# Altium PCB ZYNQ-HS-DEV-PCB.PcbDoc (part 3 of 13)
Units mm, origin at the board's own origin, x right, y up, seen from the top; angles counter-clockwise.
Board outline 125.73 x 111.93 mm, 10 copper layers (S1 (SIG), S2 (GND), S3 (SIG), S4 (GND), S5 (PWR), S6 (SIG), S7 (GND), S8 (SIG), S9 (GND), S10 (SIG)), stack 1.597 mm thick; 545 components, 400 nets, 2449 pads, 1577 vias.
Unrouted connection lines stored in the file: 309.
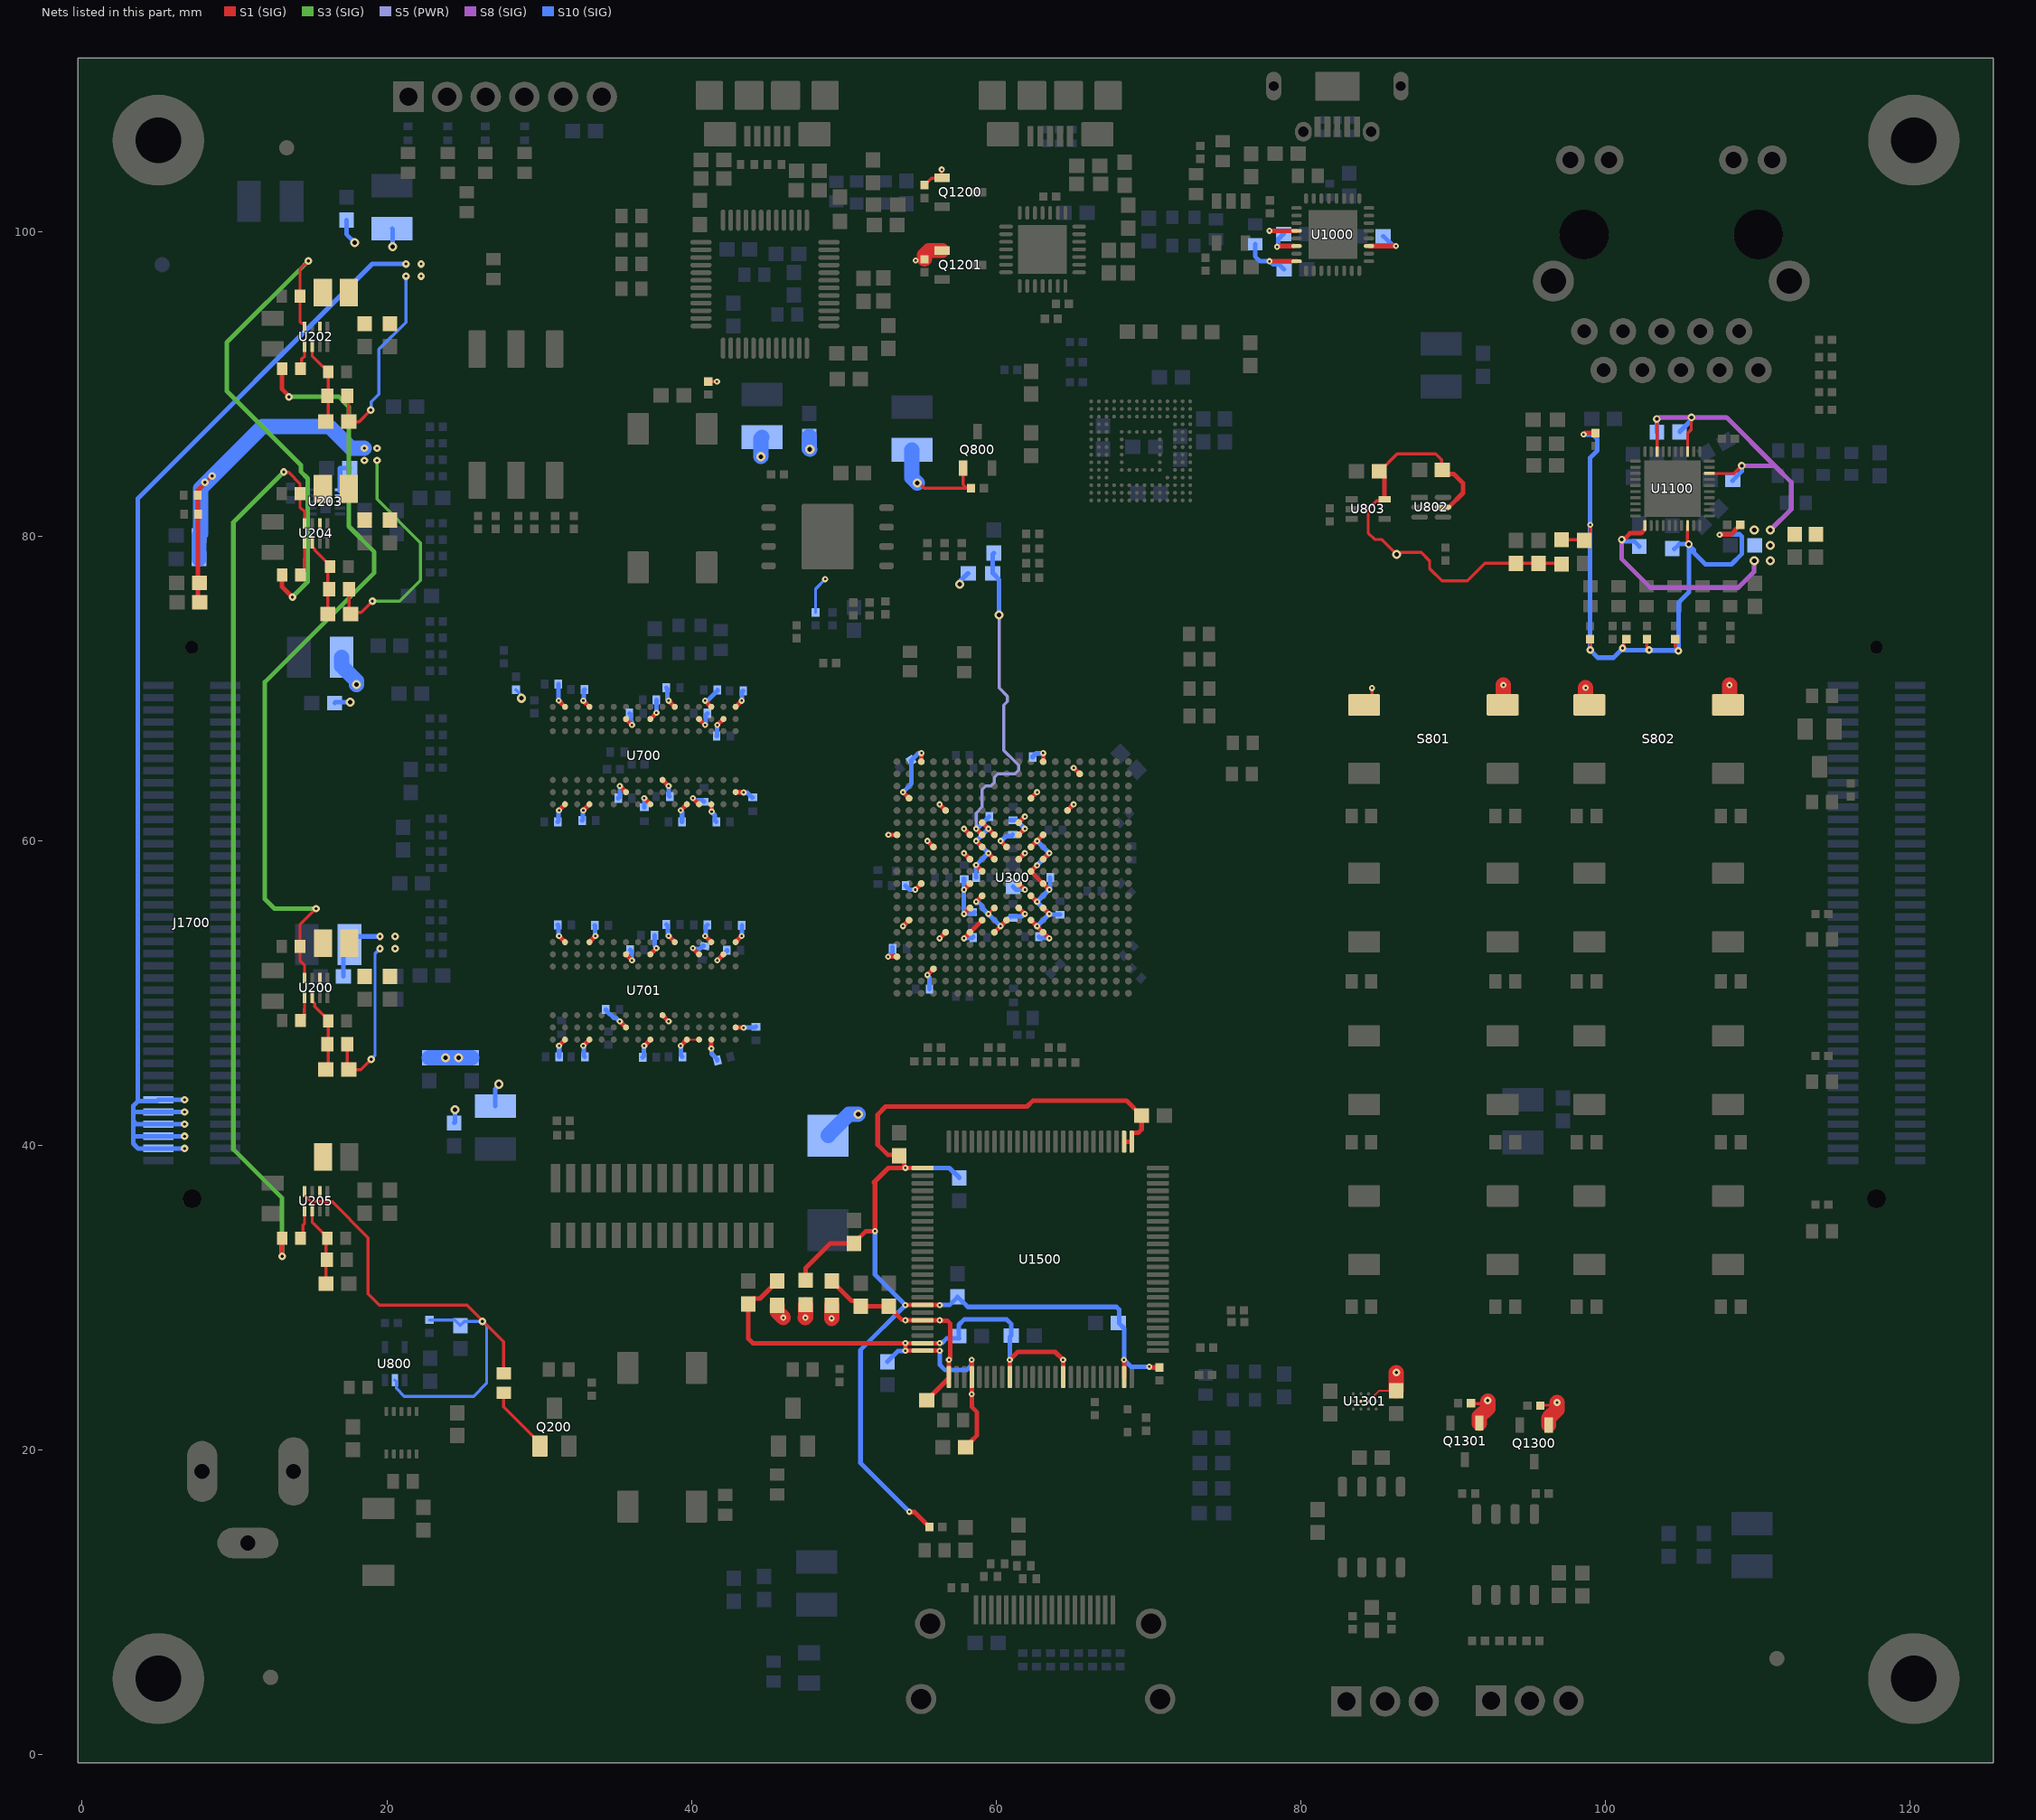
[diagram p11: the nets of this part, all layers, seen from the top]

## Part data
C200 C207 C215 C219: library part GRM1885C1H121JA01D, "CAP CER 120PF 50V C0G/NP0 0603 (1608) ±5%", Manufacturer="Murata Electronics", Package=0603, Tolerance=±5%, Voltage=50V, ComponentLink1Description=Datasheet, ComponentLink1URL=https://search.murata.co.jp/Ceramy/image/img/A01X/G101/ENG/GRM1885C1H121JA01-01.pdf, MPN=GRM1885C1H121JA01D
C201 C202 C208 C209 C212 C214 C216 C217 C220 C221 C602 C603 C714 C719 C736 C741 C1300 C1502 C1507 C1508 C1512: library part GRM188Z71A106MA73D, "CAP CER 10UF 10V X7R 0603 (1608) ±20%", Manufacturer="Murata Electronics", Package=0603, Tolerance=±20%, Voltage=10V, ComponentLink1Description=Datasheet, ComponentLink1URL=https://search.murata.co.jp/Ceramy/image/img/A01X/G101/ENG/GRM188Z71A106MA73-01A.pdf, MPN=GRM188Z71A106MA73D
C203 C210 C218 C222: library part GRM21BR71A475KE51L, "CAP CER 4.7UF 10V X7R 0805 (2012) ±10%", Manufacturer="Murata Electronics", Package=0805, Tolerance=±10%, Voltage=10V, ComponentLink1Description=Datasheet, ComponentLink1URL=https://search.murata.co.jp/Ceramy/image/img/A01X/G101/ENG/GRM21BR71A475KE51-01.pdf, MPN=GRM21BR71A475KE51L
C204 C205 C903 C908 C911 C1518 C1519: library part GRM188R61E105KA12D, "CAP CER 1UF 25V X5R 0603 (1608) ±10%", Manufacturer="Murata Power Solutions Inc.", Package=0603, Tolerance=±10%, Voltage=25V, ComponentLink1Description=Datasheet, ComponentLink1URL=https://search.murata.co.jp/Ceramy/image/img/A01X/G101/ENG/GRM188R61E105KA12-01.pdf, MPN=GRM188R61E105KA12D
C206 C1304: library part GCM188R71H102KA37D, "CAP CER 1000PF 50V X7R 0603 (1608) ±10%", Manufacturer="Murata Electronics", Package=0603, Tolerance=±10%, Voltage=50V, ComponentLink1Description=Datasheet, ComponentLink1URL=https://search.murata.co.jp/Ceramy/image/img/A01X/G101/ENG/GCM188R71H102KA37-01.pdf, MPN=GCM188R71H102KA37D
C211 C500 C502 C504 C508 C510 C511 C512 C513 C514 C515 C516 C607 C608 C609 C610 C611 C612 C701 C702 C703 C704 C705 C707 C708 C709 C710 C711 C712 C713 C716 C717 C718 C721 C722 C723 C725 C726 C727 C728 C729 C731 C732 C733 C734 C735 C738 C739 C740 C743 C744 C745 C800 C801 C802 C803 C804 C805 C806 C900 C901 C902 C905 C906 C907 C910 C912 C1000 C1002 C1003 C1004 C1005 C1007 C1100 C1102 C1103 C1105 C1107 C1108 C1109 C1111 C1113 C1115 C1116 C1200 C1202 C1301 C1302 C1303 C1305 C1500 C1501 C1503 C1504 C1505 C1506 C1509 C1510 C1511 C1513 C1514 C1515 C1516 C1517: library part GRM155R71C104KA88J, "CAP CER 0.1UF 16V X7R 0402 (1005) ±10%", Manufacturer="Murata Electronics", Package=0402, Tolerance=±10%, Voltage=16V, ComponentLink1Description=Datasheet, ComponentLink1URL=https://search.murata.co.jp/Ceramy/image/img/A01X/G101/ENG/GRM155R71C104KA88-01.pdf, MPN=GRM155R71C104KA88J
C213 C300 C306 C307 C308 C309 C310 C313 C318 C319 C320 C321 C327 C328 C329 C330 C333 C337 C338 C339 C340 C341 C342 C343 C344 C347 C353 C354 C355 C356 C600 C601 C715 C720 C737 C742 C1001: library part GRM155R60J474KE19D, "CAP CER 0.47UF 6.3V X5R 0402(1005) ±10%", Manufacturer="Murata Electronics", Package=0402, Tolerance=±10%, Voltage=6.3V, ComponentLink1Description=Datasheet, ComponentLink1URL=https://search.murata.co.jp/Ceramy/image/img/A01X/G101/ENG/GRM21BR71A475KE51-01.pdf, MPN=GRM155R60J474KE19D
C301: library part GRM188R60G106ME47D, "CAP CER 10UF 4V X5R 0603 (1608) ±20%", Manufacturer="Murata Electronics", Package=0603, Tolerance=±20%, Voltage=4V, ComponentLink1Description=Datasheet, ComponentLink1URL=https://search.murata.co.jp/Ceramy/image/img/A01X/G101/ENG/GRM188R60G106ME47-01.pdf, MPN=GRM188R60G106ME47D
C302 C316 C324 C334 C350: library part GRM32ER70J476ME20L, "CAP CER 47UF 6.3V X7R 1210 1210 (3225) ±20%", Manufacturer="Murata Electronics", Package=1210, Tolerance=±20%, Voltage=6.3V, ComponentLink1Description=Datasheet, ComponentLink1URL=https://search.murata.co.jp/Ceramy/image/img/A01X/G101/ENG/GRM32ER70J476ME20-01.pdf, MPN=GRM32ER70J476ME20L
C303: library part T525D337M006ATE025, "CAP TANT POLY 330UF 6.3V 2917 (7343) ±20%", Manufacturer=KEMET, Package=2917, Tolerance=±20%, Voltage="6.3 V", ComponentLink1Description=Datasheet, ComponentLink1URL=https://search.kemet.com/download/specsheet/T525D337M006ATE025, ESR="25mOhm @ 100kHz", MPN=T525D337M006ATE025
C304 C305 C311 C314 C317 C322 C325 C326 C332 C335 C336 C345 C348 C351 C352 C501 C503 C505 C506 C507 C509 C604 C605 C606 C904 C909 C1006 C1101 C1104 C1106 C1110 C1112 C1114 C1201 C1203 C1204 C1205 C1306: library part CL10A475KP8NNNC, "CAP CER 4.7UF 10V X5R 0603 (1608) ±10%", Manufacturer="Samsung Electro-Mechanics", Package=0603, Tolerance=±10%, Voltage=10V, ComponentLink1Description=Datasheet, ComponentLink1URL=https://mm.digikey.com/Volume0/opasdata/d220001/medias/docus/609/CL10A475KP8NNNC_Spec.pdf, MPN=CL10A475KP8NNNC
C312 C315 C323 C331 C346 C349: library part GRM32EE70G107ME19L, "CAP CER 100UF 4V X7U 1210 (3225) ±20%", Manufacturer="Murata Electronics", Package=1210, Tolerance=±20%, Voltage=4V, ComponentLink1Description=Datasheet, ComponentLink1URL=https://search.murata.co.jp/Ceramy/image/img/A01X/G101/ENG/GRM32EE70G107ME19-01.pdf, MPN=GRM32EE70G107ME19L
C357: library part CC0805KRX7RCBB102, "CAP CER 1000PF 1KV X7R 0805 (2012) ±10%", Manufacturer=YAGEO, Package=0805, Tolerance=±10%, Voltage=1kV, ComponentLink1Description=Datasheet, ComponentLink1URL=https://search.murata.co.jp/Ceramy/image/img/A01X/G101/ENG/GRM21BR71A475KE51-01.pdf, MPN=CC0805KRX7RCBB102
C1008 C1117 C1520: library part C0603C104K5RACTU, "CAP CER 0.1UF 50V X7R 0603 (1608) ±10%", Manufacturer=KEMET, Package=0603, Tolerance=±10%, Voltage=50V, ComponentLink1Description=Datasheet, ComponentLink1URL=https://yageogroup.com/content/datasheet/asset/file/KEM_C1002_X7R_SMD, MPN=C0603C104K5RACTU
D200: library part CMS04, "Diode 30 V 5A Surface Mount M-FLAT (2.4x3.8)", Manufacturer="Toshiba Semiconductor and Storage", MPN=CMS04(TE12L,Q, Package=SOD-123, ComponentLink1Description=Datasheet, ComponentLink1URL=https://toshiba.semicon-storage.com/info/CMS04_datasheet_en_20180911.pdf?did=3133&prodName=CMS04
D201 D400 D800 D1003 D1400 D1401 D1402: library part LTST-C191TGKT, "LED GREEN CLEAR CHIP SMD", Manufacturer="Lite-On Inc.", Package=0603, ComponentLink1Description=Datasheet, ComponentLink1URL=https://optoelectronics.liteon.com/upload/download/DS22-2000-300/LTST-C191TGKT.PDF, MPN=LTST-C191TGKT
D500 D501 D502 D503 D504 D505 D1000 D1001 D1002 D1200 D1201 D1202 D1501 D1502 D1503 D1504 D1505 D1506 D1507 D1508 D1509 D1510 D1511 D1512 D1513: "Varistor 1 Circuit Surface Mount, MLCV 0402 (1005 Metric)", Manufacturer="EPCOS - TDK Electronics", Package=0402, ComponentLink1Description=Datasheet, ComponentLink1URL=https://www.tdk-electronics.tdk.com/inf/75/ds/High_speed_series.pdf?ref_disty=digikey, MPN=B72590D0050H160
D1500: "DIODE STANDARD 100V 200MA SOD523", Manufacturer=onsemi, Package=SOD-523, ComponentLink1Description=Datasheet, ComponentLink1URL=https://www.onsemi.com/pdf/datasheet/bas16xv2t1-d.pdf, MPN=BAS16XV2T1G
FB300: library part BLM18SG121TN1D, "FERRITE BEAD 120 OHM 0603 (1608) 3A 25mOhm", Current Rating (Max)=3A, DC Resistance (DCR) (Max)=25mOhm, Manufacturer="Murata Electronics", Package=0603, ComponentLink1Description=Datasheet, ComponentLink1URL=https://pim.murata.com/asset/pim4/ferriteBeadInductortypefilter/ENFA0003_PDF_FERRITEBEADINDUCTORTYPEFILTER?lastModifiedDatetime=20250707190934, ComponentLink2Description=Website, ComponentLink2URL=https://pim.murata.com/en-global/pim/details/?partNum=BLM18SG121TN1%23, MPN=BLM18SG121TN1D, Impedance @ Frequency="120 Ohms @ 100 MHz"
FB500 FB501 FB502 FB1100 FB1101 FB1200 FB1500 FB1501 FB1502 FB1503: library part BLM18SG121TN1D, "FERRITE BEAD 120 OHM 0603 (1608) 3A 25mOhm", Current Rating (Max)=3A, DC Resistance (DCR) (Max)=25mOhm, Manufacturer="Murata Electronics", Package=0603, Impedance @ Frequency="120 Ohms @ 100 MHz", ComponentLink1Description=Datasheet, ComponentLink1URL=https://pim.murata.com/asset/pim4/ferriteBeadInductortypefilter/ENFA0003_PDF_FERRITEBEADINDUCTORTYPEFILTER?lastModifiedDatetime=20250707190934, ComponentLink2Description=Website, ComponentLink2URL=https://pim.murata.com/en-global/pim/details/?partNum=BLM18SG121TN1%23, MPN=BLM18SG121TN1D
FID200 FID201 FID202 FID203 FID204 FID205: library part Fiducial_Marker, "Fiducial Marker 1mm No Bom"
J200: "CONNECTOR DC JACK POWER PCB TYPE 2.50MM KLS", Manufacturer="KLS ELECTRONIC", MPN=L-KLS1-DC-005A-2.0, ComponentLink1Description=Datasheet, ComponentLink1URL=https://www.ozdisan.com/api/pdf/product/assets/KLS1-DC-005A.pdf
J500 J1200: library part USB-MICRO-B, "CONN RCPT USB2.0 MICRO B SMD R/A", Manufacturer="Amphenol ICC (FCI)", ComponentLink1Description=Datasheet, ComponentLink1URL=https://cdn.amphenol-cs.com/media/wysiwyg/files/documentation/datasheet/inputoutput/io_usb_micro.pdf, MPN=10118192-0001LF
J501: library part JTAG-HEADER, "JTAG CONN HEADER VERT 6POS 2.54MM"
J1000: library part USB-MICRO-AB, "CONN RCPT MICRO USB AB 5P SMD RA", Manufacturer=Molex, ComponentLink1Description=Datasheet, ComponentLink1URL=https://www.molex.com/content/dam/molex/molex-dot-com/products/automated/en-us/salesdrawingpdf/475/47590/475900001_sd.pdf?inline, MPN=0475900001
J1100: "Jack Modular Connector RJ45 Through Hole Shielded", Manufacturer=Hanrun, ComponentLink1Description=Datasheet, ComponentLink1URL=https://www.lcsc.com/datasheet/C55679.pdf, MPN=HY911130A
J1300 J1301: library part 282834-3, "TERM BLK 3P SIDE ENT 2.54MM PCB"
J1500: "CONN RCPT 1.4 HDMI 19POS SMD R/A", Manufacturer="Amphenol ICC (FCI)", ComponentLink1Description=Datasheet, ComponentLink1URL=https://cdn.amphenol-cs.com/media/wysiwyg/files/documentation/datasheet/inputoutput/io_hdmi_receptacles.pdf, ComponentLink2Description=Drawing, ComponentLink2URL=https://cdn.amphenol-cs.com/media/wysiwyg/files/drawing/10029449.pdf, ComponentLink3Description="Product Specification", ComponentLink3URL=https://cdn.amphenol-cs.com/media/wysiwyg/files/documentation/gs-12-309.pdf, MPN=10029449-111RLF
J1600: "CONN FPC VERT 15POS 1MM SMD", Manufacturer="TE Connectivity AMP Connectors", ComponentLink2Description=Drawing, ComponentLink2URL=https://www.te.com/commerce/DocumentDelivery/DDEController?Action=srchrtrv&DocNm=1734248&DocType=Customer%20Drawing&DocLang=English&DocFormat=pdf&PartCntxt=1-1734248-5, ComponentLink3Description="Product Specification", ComponentLink3URL=https://www.te.com/commerce/DocumentDelivery/DDEController?Action=srchrtrv&DocNm=108-57080&DocType=Specification%20Or%20Standard&DocLang=English&DocFormat=pdf&PartCntxt=1-1734248-5, MPN=1-1734248-5
J1700 J1701: "BergStak® Lite 0.80mm, Board-to-Board Connector, 80 Positions, Dual Row, Vertical Header", Manufacturer=Amphenol, MPN=10144518-082802LF
L200 L201 L202 L203: library part DFE201610E-R47M=P2, "FIXED IND 470NH 3.6A 32 MOHM SMD 0806 (2016 Metric)", Current - Saturation (Isat)=4.8A, Current Rating (Max)="3.6 A", DC Resistance (DCR) (Max)=32mOhm, Manufacturer="Murata Electronics", MPN=DFE201610E-R47M=P2, Package=0806, Inductance="470 nH", ComponentLink1Description=Datasheet, ComponentLink1URL=https://pim.murata.com/asset/pim4/inductor/J(E)TE243A-0001_PDF_INDUCTOR?lastModifiedDatetime=20250708072022, ComponentLink2Description=Website, ComponentLink2URL=https://pim.murata.com/en-global/pim/details/?partNum=DFE201610E-R47M%23
L1100: library part LQM18PN2R2MGHD, "FIXED IND 2.2UH 1.05A 250 MOHM 0603 (1608 Metric)", Current - Saturation (Isat)=250mA, Current Rating (Max)="1.05 A", DC Resistance (DCR) (Max)=250mOhm, Manufacturer="Murata Electronics", Package=0603, Inductance="2.2 µH", ComponentLink1Description=Datasheet, ComponentLink1URL=https://search.murata.co.jp/Ceramy/image/img/P02/JELF243B-0047.pdf, ComponentLink2Description=Website, ComponentLink2URL=https://pim.murata.com/en-eu/pim/details/?partNum=LQM18PN2R2MGHD, MPN=LQM18PN2R2MGHD
Q200 Q400 Q801: "N-Channel 20 V 1.3A (Ta) 500mW (Ta) Surface Mount SOT-23-3", Drain to Source Voltage (Vdss)="20 V", Manufacturer=onsemi, Package=SOT-23-3, ComponentLink1Description=Datasheet, ComponentLink1URL=https://www.onsemi.com/pdf/datasheet/nds331n-d.pdf, MPN=NDS331N, Rds On (Max) @ Id, Vgs="160mOhm @ 1.5A, 4.5V", Vgs (Max)=±8V
Q800 Q1200 Q1201 Q1300 Q1301: "N-Channel 50 V 200mA (Ta) 225mW (Ta) Surface Mount SOT-23-3 (TO-236)", Drain to Source Voltage (Vdss)="50 V", Manufacturer=onsemi, Package=SOT-23-3, ComponentLink1Description=Datasheet, ComponentLink1URL=https://www.onsemi.com/pdf/datasheet/bss138lt1-d.pdf, MPN=BSS138LT1G, Rds On (Max) @ Id, Vgs="3.5Ohm @ 200mA, 5V", Vgs (Max)=±20V
R200 R202 R204 R205 R207 R208 R209 R213 R214 R215 R217 R218: library part CRCW0603100KFKEA, "RES SMD 100K OHM 1% 1/8W 0603 (1608)", Manufacturer="Vishay Dale", Package=0603, Tolerance=±1%, Voltage=75V, ComponentLink1Description=Datasheet, ComponentLink1URL=https://www.vishay.com/docs/20035/dcrcwe3.pdf, MPN=CRCW0603100KFKEA
R201: library part CRCW060366K5FKEA, "RES SMD 66.5K OHM 1% 1/8W 0603 (1608)", Manufacturer="Vishay Dale", Package=0603, Tolerance=±1%, Voltage=75V, ComponentLink1Description=Datasheet, ComponentLink1URL=https://www.vishay.com/docs/20035/dcrcwe3.pdf, MPN=CRCW060366K5FKEA
R203 R300: library part CRCW06031M00FKEA, "RES SMD 1M OHM 1% 1/8W 0603 (1608)", Manufacturer="Vishay Dale", Package=0603, Tolerance=±1%, Voltage=75V, ComponentLink1Description=Datasheet, ComponentLink1URL=https://www.vishay.com/docs/20035/dcrcwe3.pdf, MPN=CRCW06031M00FKEA
R206: library part CRCW0603200KFKEBC, "RES 200K OHM 1% 1/10W 0603 (1608)", Manufacturer="Vishay Dale", Package=0603, Tolerance=±1%, Voltage=75V, ComponentLink1Description=Datasheet, ComponentLink1URL=https://www.vishay.com/docs/28773/crcwce3.pdf, MPN=CRCW0603200KFKEBC
R210 R404 R819 R916 R917 R918 R919 R920 R1110 R1111 R1112 R1113 R1114 R1118 R1122 R1400 R1401 R1402 R1407: library part RC0402JR-071KL, "RES 1K OHM 5% 1/16W 0402 (1005)", Manufacturer=YAGEO, Package=0402, Tolerance=±5%, Voltage=50V, ComponentLink1Description=Datasheet, ComponentLink1URL=https://yageogroup.com/content/datasheet/asset/file/PYU-RT_1-TO-0-01_ROHS_L, MPN=RC0402JR-071KL
R211 R400 R401 R402 R403 R820 R821 R822 R823 R824 R1004 R1403 R1404 R1405 R1406 R1408 R1409 R1410 R1411 R1412 R1413 R1414 R1415 R1505: library part RC0603FR-0710KL, "RES 10K OHM 1% 1/10W 0603(1608)", Manufacturer=YAGEO, Package=0603, Tolerance=±1%, Voltage=75V, ComponentLink1Description=Datasheet, ComponentLink1URL=https://yageogroup.com/content/datasheet/asset/file/PYU-RC_GROUP_51_ROHS_L, MPN=RC0603FR-0710KL
R212: library part CRCW0603124KFKEA, "RES SMD 124K OHM 1% 1/8W 0603 (1608)", Manufacturer="Vishay Dale", Package=0603, Tolerance=±1%, Voltage=75V, ComponentLink1Description=Datasheet, ComponentLink1URL=https://www.vishay.com/docs/20035/dcrcwe3.pdf, MPN=CRCW0603124KFKEA
R216: library part CRCW0603453KFKEAC, "RES 453K OHM 1% 1/10W 0603(1608)", Manufacturer="Vishay Dale", Package=0603, Tolerance=±1%, Voltage=75V, ComponentLink1Description=Datasheet, ComponentLink1URL=https://www.vishay.com/docs/28773/crcwce3.pdf, MPN=CRCW0603453KFKEAC
R405: library part RC0603FR-07330RL, "RES 330 OHM 1% 1/10W 0603(1608)", Manufacturer=YAGEO, Package=0603, Tolerance=±1%, Voltage=75V, ComponentLink1Description=Datasheet, ComponentLink1URL=https://yageogroup.com/content/datasheet/asset/file/PYU-RC_GROUP_51_ROHS_L, MPN=RC0603FR-07330RL
R500 R501 R502 R503 R505 R506 R507 R509 R510 R806 R809 R811 R812 R813 R814 R815 R816 R817 R1002 R1104 R1105 R1106 R1107 R1108 R1109 R1117 R1119 R1121 R1510: library part RC0603FR-0722RL, "RES 22 OHM 1% 1/10W 0603 (1608)", Manufacturer=YAGEO, Package=0603, Tolerance=±1%, Voltage=75V, ComponentLink1Description=Datasheet, ComponentLink1URL=https://yageogroup.com/content/datasheet/asset/file/PYU-RC_GROUP_51_ROHS_L, MPN=RC0603FR-0722RL
R504 R508: library part RC0603FR-0712KL, "RES 12K OHM 1% 1/10W 0603 (1608)", Manufacturer=YAGEO, Package=0603, Tolerance=±1%, Voltage=75V, ComponentLink1Description=Datasheet, ComponentLink1URL=https://yageogroup.com/content/datasheet/asset/file/PYU-RC_GROUP_51_ROHS_L, MPN=RC0603FR-0712KL
R600 R601 R602 R603 R604 R605 R606 R607 R608 R609 R610 R611 R612 R613 R614 R615 R616 R617 R618 R619 R620 R621 R622 R623: library part RC0402FR-0740R2L, "RES 40.2 OHM 1% 1/16W 0402 (1005)", Manufacturer=YAGEO, Package=0402, Tolerance=±1%, Voltage=50V, ComponentLink1Description=Datasheet, ComponentLink1URL=https://yageogroup.com/content/datasheet/asset/file/PYU-RC_GROUP_51_ROHS_L, MPN=RC0402FR-0740R2L
R624 R625 R627: library part RT0402FRE0780RL, "RES 80 OHM 1% 1/16W 0402 (1005)", Manufacturer=YAGEO, Package=0402, Tolerance=±1%, Voltage=50V, ComponentLink1Description=Datasheet, ComponentLink1URL=https://yageogroup.com/content/datasheet/asset/file/PYU-RT_1-TO-0-01_ROHS_L, MPN=RT0402FRE0780RL
R626 R1100 R1101 R1103 R1115 R1116 R1120 R1200 R1201 R1202 R1203 R1204 R1302 R1303 R1306 R1307 R1604 R1605: library part RC0402JR-074K7L, "RES 4.7K OHM 5% 1/16W 0402 (1005)", Manufacturer=YAGEO, MPN=RT0402FRE0780RL, Package=0402, Tolerance=±5%, Voltage=50V, ComponentLink1Description=Datasheet, ComponentLink1URL=https://yageogroup.com/content/datasheet/asset/file/PYU-RC_GROUP_51_ROHS_L
R700 R701: library part RC0402FR-07240RL, "RES 240 OHM 1% 1/16W 0402 (1005)", Manufacturer=YAGEO, Package=0402, Tolerance=±1%, Voltage=50V, ComponentLink1Description=Datasheet, ComponentLink1URL=https://yageogroup.com/content/datasheet/asset/file/PYU-RC_GROUP_51_ROHS_L, MPN=RC0402FR-07240RL
R800 R801 R802 R803 R804 R805 R807 R808 R810 R818 R900 R901 R902 R903 R904 R905 R906 R908 R911 R912 R913 R914 R915 R1003 R1006: library part RC0402FR-0720KL, "RES 20K OHM 1% 1/16W 0402 (1005)", Manufacturer=YAGEO, Package=0402, Tolerance=±1%, Voltage=50V, ComponentLink1Description=Datasheet, ComponentLink1URL=https://yageogroup.com/content/datasheet/asset/file/PYU-RT_1-TO-0-01_ROHS_L, MPN=RC0402FR-0720KL
R907 R909 R910 R1102 R1304 R1308: library part DNP_RES, "DO NOT POPULATE RESISTOR", Manufacturer=***, Package=0402, ComponentLink1Description=Datasheet, ComponentLink1URL=https://yageogroup.com/content/datasheet/asset/file/PYU-RT_1-TO-0-01_ROHS_L, MPN=***, Tolerance=***, Voltage=***
R1000 R1001: library part RC0603FR-071KL, "RES 1K OHM 1% 1/10W 0603 (1608)", Manufacturer=YAGEO, Package=0603, Tolerance=±1%, Voltage=75V, ComponentLink1Description=Datasheet, ComponentLink1URL=https://yageogroup.com/content/datasheet/asset/file/PYU-RC_GROUP_51_ROHS_L, MPN=RC0603FR-071KL
R1005: library part RC0402FR-138K06L, "RES 8.06K OHM 1% 1/16W 0402 (1005)", Manufacturer=YAGEO, Package=0402, Tolerance=±1%, Voltage=50V, ComponentLink1Description=Datasheet, ComponentLink1URL=https://yageogroup.com/content/datasheet/asset/file/PYU-RT_1-TO-0-01_ROHS_L, MPN=RC0402FR-138K06L
R1123 R1503 R1504 R1506 R1507 R1508: library part RC0402FR-132K49L, "RES 2.49K OHM 1% 1/16W 0402 (1005)", Manufacturer=YAGEO, Package=0402, Tolerance=±1%, Voltage=50V, ComponentLink1Description=Datasheet, ComponentLink1URL=https://yageogroup.com/content/datasheet/asset/file/PYU-RC_GROUP_51_ROHS_L, MPN=RC0402FR-132K49L
R1300 R1301: library part RC0402FR-0760R4L, "RES 60.4 OHM 1% 1/16W 0402 (1005)", Manufacturer=YAGEO, Package=0402, Tolerance=±1%, Voltage=50V, ComponentLink1Description=Datasheet, ComponentLink1URL=https://yageogroup.com/content/datasheet/asset/file/PYU-RC_GROUP_51_ROHS_L, MPN=RC0402FR-0760R4L
R1305: library part RC0402FR-07120RL, "RES 120 OHM 1% 1/16W 0402 (1005)", Manufacturer=YAGEO, Package=0402, Tolerance=±1%, Voltage=50V, ComponentLink1Description=Datasheet, ComponentLink1URL=https://yageogroup.com/content/datasheet/asset/file/PYU-RC_GROUP_51_ROHS_L, MPN=RC0402FR-07120RL
R1500: library part RC0402FR-0727KL, "RES 27K OHM 1% 1/16W 0402 (1005)", Manufacturer=YAGEO, Package=0402, Tolerance=±1%, Voltage=50V, ComponentLink1Description=Datasheet, ComponentLink1URL=https://yageogroup.com/content/datasheet/asset/file/PYU-RC_GROUP_51_ROHS_L, MPN=RC0402FR-0727KL
R1501 R1502: library part RC0402FR-0749R9L, "RES 49.9 OHM 1% 1/16W 0402 (1005)", Manufacturer=YAGEO, Package=0402, Tolerance=±1%, Voltage=50V, ComponentLink1Description=Datasheet, ComponentLink1URL=https://yageogroup.com/content/datasheet/asset/file/PYU-RC_GROUP_51_ROHS_L, MPN=RC0402FR-0749R9L
R1509: library part RC0603FR-07887RL, "RES 887 OHM 1% 1/10W 0603 (1608)", Manufacturer=YAGEO, Package=0603, Tolerance=±1%, Voltage=75V, ComponentLink1Description=Datasheet, ComponentLink1URL=https://yageogroup.com/content/datasheet/asset/file/PYU-RC_GROUP_51_ROHS_L, MPN=RC0603FR-07887RL
R1600 R1602 R1603 R1607 R1608 R1610: library part RC0402FR-07100RL, "RES 100 OHM 1% 1/16W 0402 (1005)", Manufacturer=YAGEO, Package=0402, Tolerance=±1%, Voltage=50V, ComponentLink1Description=Datasheet, ComponentLink1URL=https://yageogroup.com/content/datasheet/asset/file/PYU-RC_GROUP_51_ROHS_L, MPN=RC0402FR-07100RL
R1601 R1606 R1609: library part RC0402FR-07150RL, "RES 150 OHM 1% 1/16W 0402 (1005)", Manufacturer=YAGEO, Package=0402, Tolerance=±1%, Voltage=50V, ComponentLink1Description=Datasheet, ComponentLink1URL=https://yageogroup.com/content/datasheet/asset/file/PYU-RC_GROUP_51_ROHS_L, MPN=RC0402FR-07150RL
S400 S800 S801 S802 S1400 S1401 S1402 S1403 S1404 S1405: "SWITCH TACTILE SPST-NO 0.05A 12V", Manufacturer=E-Switch, ComponentLink1Description=Datasheet, ComponentLink1URL=https://configured-product-images.s3.amazonaws.com/Datasheets/TL3301.pdf, MPN=TL3301EF100QG
SW900: "Dip Switch SPST 3 Position Surface Mount Slide (Standard) Actuator 100mA 20VDC", Manufacturer="CTS Electrocomponents", ComponentLink1Description=Datasheet, ComponentLink1URL=https://www.ctscorp.com/Files/DataSheets/Switches/DIP-Switches/CTS-Switches-DIP-219-Series-Datasheet.pdf, MPN=219-3LPST
U200 U202 U204 U205: "2.4-V to 5.5-V input, 3-A step-down converter with 1% accuracy in 1.5-mm x 2-mm VSON-HR package", Manufacturer="Texas Instruments", ComponentLink1Description=Datasheet, ComponentLink1URL=https://www.ti.com/lit/ds/symlink/tps62823.pdf, ComponentLink2Description="Evaluation Module", ComponentLink2URL=https://www.ti.com/lit/ug/slvuba0/slvuba0.pdf, MPN=TPS62823DLCR
U201: "Electronic Fuse Regulator 5A 10-VSON (3x3)", Manufacturer="Texas Instruments", ComponentLink1Description=Datasheet, ComponentLink1URL=https://www.ti.com/lit/ds/symlink/tps25925.pdf?HQS=dis-dk-null-digikeymode-dsf-pf-null-wwe&ts=1768606527240&ref_url=https%253A%252F%252Fwww.ti.com%252Fgeneral%252Fdocs%252Fsuppproductinfo.tsp%253FdistId%253D10%2526gotoUrl%253Dhttps%253A%252F%252Fwww.ti.com%252Flit%252Fgpn%252Ftps25925, ComponentLink2Description="Evaluation Module", ComponentLink2URL=https://www.ti.com/lit/ug/sluub64/sluub64.pdf?ts=1768615249837, MPN=TPS259250DRCR
U203: library part TPS51206, "Converter, DDR Voltage Regulator IC 1 Output 10-WSON (2x2)", Manufacturer="Texas Instruments", Package=10-WSON, ComponentLink1Description=Datasheet, ComponentLink1URL=https://www.ti.com/lit/ds/symlink/tps51206.pdf?HQS=dis-dk-null-digikeymode-dsf-pf-null-wwe&ts=1769211972272&ref_url=https%253A%252F%252Fwww.ti.com%252Fgeneral%252Fdocs%252Fsuppproductinfo.tsp%253FdistId%253D10%2526gotoUrl%253Dhttps%253A%252F%252Fwww.ti.com%252Flit%252Fgpn%252Ftps51206, MPN=TPS51206DSQR
U300: "Dual ARM® Cortex®-A9 MPCore™ with CoreSight™ System On Chip (SOC) IC Zynq®-7000 Artix™-7 FPGA, 85K Logic Cells 766MHz 400-CSPBGA (17x17)", Manufacturer=AMD/XILINX, ComponentLink1Description=Datasheet, ComponentLink1URL=https://docs.amd.com/v/u/en-US/ds190-Zynq-7000-Overview, ComponentLink2Description="DC and AC Switching Characteristics", ComponentLink2URL=https://docs.amd.com/v/u/en-US/ds187-XC7Z010-XC7Z020-Data-Sheet, ComponentLink3Description="PCB Design Guide", ComponentLink3URL=https://docs.amd.com/v/u/en-US/ug933-Zynq-7000-PCB, ComponentLink4Description="Packaging and Pinout", ComponentLink4URL=https://docs.amd.com/v/u/en-US/ug865-Zynq-7000-Pkg-Pinout, ComponentLink5Description="Zynq 7000 SoC Technical Reference Manual", ComponentLink5URL=https://docs.amd.com/r/en-US/ug585-zynq-7000-SoC-TRM, MPN=XC7Z020-2CLG400I
U500: "USB Bridge, USB to UART (JTAG),FIFO USB 2.0 UART, FIFO Interface 48-LQFP (7x7)", Manufacturer="FTDI, Future Technology Devices International Ltd", MPN=FT232HL-REEL, ComponentLink1Description=Datasheet, ComponentLink1URL=https://ftdichip.com/wp-content/uploads/2024/09/DS_FT232H.pdf#page=51&zoom=100,72,126
U700 U701: "SDRAM - DDR3L Memory IC 4Gbit Parallel 933 MHz 20 ns 96-FBGA (8x14)", Manufacturer="Micron Technology Inc.", ComponentLink1Description=Datasheet, ComponentLink1URL=https://datasheet.octopart.com/MT41K256M16TW-107%3AP-Micron-datasheet-149527670.pdf, MPN="MT41K256M16TW-107 IT:P"
U800 U803: "IC BUFFER NON-INVERT 5.5V SC-88A", Manufacturer=onsemi, ComponentLink1Description=Datasheet, ComponentLink1URL=https://www.onsemi.com/pdf/datasheet/nl17sz17-d.pdf, MPN=NL17SZ17DFT2G
U802: "IC BUFFER NON-INVERT 5.5V SC-88", Manufacturer=onsemi, ComponentLink1Description=Datasheet, ComponentLink1URL=https://www.onsemi.com/pdf/datasheet/nc7wz07-d.pdf, MPN=NC7WZ07P6X
U900: "FLASH - NAND (MLC) Memory IC 64Gbit eMMC_5.1 200 MHz 153-FBGA (11.5x13)", Manufacturer="Flexxon Pte Ltd", ComponentLink1Description=Datasheet, ComponentLink1URL=https://mm.digikey.com/Volume0/opasdata/d220001/medias/docus/6348/FLEXXON%20eMMC%205.1%20MLC%20%28XTRA%20III%20153ball%29%20SPEC%20V1.9.pdf, ComponentLink2Description="eMMC Design Guide", ComponentLink2URL=https://www.flexxon.com/wp-content/uploads/Technical%20Info/FLEXXON%20eMMC%20Design%20Guide%20(XTRA%20III%20153Balls)%20V1.2.pdf?x72842, MPN=FEMC008GSTE9-T14-16
U901: "FLASH - NOR Memory IC 256Mbit SPI - Quad I/O 133 MHz 8-WSON (8x6)", Manufacturer="Winbond Electronics", ComponentLink1Description=Datasheet, ComponentLink1URL=https://www.winbond.com/resource-files/w25q256jv%20spi%20revg%2008032017.pdf, MPN=W25Q256JVEIQ
U1000: "Hi-Speed USB 2.0 ULPI Transceiver", Manufacturer=Microchip, ComponentLink1Description=Datasheet, ComponentLink1URL=https://ww1.microchip.com/downloads/aemDocuments/documents/UNG/ProductDocuments/DataSheets/USB3320-Data-Sheet-DS00001792.pdf, MPN=USB3320C-EZK-TR
U1001: "Power Switch/Driver 1:1 N-Channel 500mA SOT-23-5", Manufacturer="Texas Instruments", ComponentLink1Description=Datasheet, ComponentLink1URL=https://www.ti.com/lit/ds/symlink/tps2051b.pdf?ts=1769451796682&ref_url=https%253A%252F%252Fwww.ti.com%252Fproduct%252FTPS2051B, MPN=TPS2051BDBVR
U1100: "RGMII Ethernet Transceiver WQFN-40-EP(5x5) Drivers, Receivers, Transceivers RoHS", Manufacturer=REALTEK, ComponentLink1Description=Datasheet, ComponentLink1URL=https://www.lcsc.com/datasheet/C187932.pdf, MPN=RTL8211F-CG
U1200: "USB Bridge, USB to UART USB 2.0 UART Interface 28-QFN (5x5)", Manufacturer="Silicon Labs", ComponentLink1Description=Datasheet, ComponentLink1URL=https://www.silabs.com/documents/public/data-sheets/CP2102-9.pdf, MPN=CP2102-GM
U1300: "CAN Interface IC High-Speed CAN Transceiver with Standby Mode SOIC8", Manufacturer="NXP USA Inc.", ComponentLink1Description=Datasheet, ComponentLink1URL=https://www.nxp.com/docs/en/data-sheet/TJA1040.pdf, MPN=TJA1040T/CM,118
U1301: "Voltage Level Translator Bidirectional 1 Circuit 4 Channel 24Mbps 12-DSBGA (1.9x1.4)", Manufacturer="Texas Instruments", ComponentLink1Description=Datasheet, ComponentLink1URL=https://www.ti.com/lit/ds/symlink/txs0104e.pdf?HQS=dis-dk-null-digikeymode-dsf-pf-null-wwe&ts=1769494565851&ref_url=https%253A%252F%252Fwww.ti.com%252Fgeneral%252Fdocs%252Fsuppproductinfo.tsp%253FdistId%253D10%2526gotoUrl%253Dhttps%253A%252F%252Fwww.ti.com%252Flit%252Fgpn%252Ftxs0104e, MPN=TXS0104EYZTR
U1302: "1/1 Transceiver Half RS422, RS485 8-SOIC", Manufacturer="Analog Devices Inc./Maxim Integrated", ComponentLink1Description=Datasheet, ComponentLink1URL=https://www.analog.com/media/en/technical-documentation/data-sheets/max3483-max3491.pdf, MPN=MAX3485ESA+T
U1500: "225 MHz, High Performance HDMI® Transmitter with ARC", Manufacturer="Analog Devices Inc./Maxim Integrated", ComponentLink1Description=Datasheet, ComponentLink1URL=https://www.analog.com/media/en/technical-documentation/data-sheets/ADV7511.pdf, ComponentLink2Description="Hardware User's Guide", ComponentLink2URL=https://www.analog.com/media/en/technical-documentation/user-guides/ADV7511_Hardware_Users_Guide.pdf, ComponentLink3Description="HDMI-Enabled Designs Using the ADV7511", ComponentLink3URL=https://www.analog.com/media/en/technical-documentation/evaluation-documentation/hdmi-enabled_designs_using_adv7511.pdf, ComponentLink4Description="Design Support Files", ComponentLink4URL=https://ez.analog.com/video/w/documents/794/adv7511-design-support-files, MPN=ADV7511KSTZ
X500 X1000 X1500: "XTAL OSC XO 12.0000MHZ CMOS SMD", Manufacturer="ECS Inc.", ComponentLink1Description=Datasheet, ComponentLink1URL=https://ecsxtal.com/store/pdf/ECS-2520MV.pdf, MPN=ECS-2520MV-120-BN-TR
X800: "33.3333 MHz XO (Standard) HCMOS, LVCMOS Oscillator 1.6V ~ 3.6V Enable/Disable 4-SMD, No Lead", Manufacturer="Abracon LLC", ComponentLink1Description=Datasheet, ComponentLink1URL=https://abracon.com/datasheets/ASDDV.pdf, MPN=ASDDV-33.3333MHZ-LC-T
X1100: "25 MHz XO (Standard) HCMOS, LVCMOS Oscillator 1.6V ~ 3.6V Enable/Disable 4-SMD, No Lead", Manufacturer="Abracon LLC", ComponentLink1Description=Datasheet, ComponentLink1URL=https://abracon.com/datasheets/ASDDV.pdf, MPN=ASDDV-25.000MHZ-LC-T

## Free pads (board coordinates)
  round 6 hole 3 mask+0.05: 2(5,5) 2(5,106) 2(120.25,5) 2(120.25,106)

## Via types
v1: diameter 0.4, hole 0.15, S1 (SIG) to S10 (SIG), tented both sides, 892 vias
v2: diameter 0.5, hole 0.2, S1 (SIG) to S10 (SIG), tented both sides, 231 vias
v3: diameter 0.6, hole 0.3, S1 (SIG) to S10 (SIG), tented both sides, 188 vias
v4: diameter 1, hole 0.5, S1 (SIG) to S10 (SIG), tented both sides, 158 vias
v5: diameter 0.5, hole 0.25, S1 (SIG) to S10 (SIG), tented both sides, 108 vias

## Nets (pads, with @x,y where several pads share a name; then routed paths per layer and width w, separated by ;. In a path a pad name is that pad's centre, name@x,y a point inside that pad or via, vN(x,y) a via of type N, cw(c..) or ccw(c..) an arc to the next point about the centre after c; other vN are vias at no path point)
1V0_EN: R200.1 U200.1 | length 1.6
  S1 (SIG) w0.2: R200.1@14.325,48.2 14.575,48.45 14.575,48.98 14.6,49.005 U200.1@14.6,49.71
1V0_FB: C200.1 R201.1 R204.2 U200.2 | length 5.2
  S1 (SIG) w0.2: U200.2@15.1,49.71 15.1,49.485 15.275,49.31 15.275,49.125 16.15,48.25 R204.2@16.15,48.175 16.15,45.125 C200.1@16,44.975
1V0_PG: R202.1 R207.2 U200.8 | length 50.9
  S1 (SIG) w0.2: U200.8@14.6,51 14.6,51.838 14.3,52.137 R202.1@14.3,53.075 14.3,54.5 v2(15.35,55.55)
  S1 (SIG) w0.3: R207.2@13.125,91 13.125,89.654 13.575,89.204 v2(13.575,89.15)
  S3 (SIG) w0.3: v2(13.575,89.15) 16.859,89.15 17.5,88.509 17.5,80.64 19.175,78.965 19.175,77.6 12,70.425 12,56.175 12.625,55.55 v2(15.35,55.55)
1V0_SW: L200.1 U200.6
1V8_EN: R207.1 U202.1 | length 1.5
  S1 (SIG) w0.2: R207.1@14.325,91 14.408,91.083 14.408,91.625 14.6,91.817 U202.1@14.6,92.435
1V8_FB: C207.1 R206.1 R209.2 U202.2 | length 5.5
  S1 (SIG) w0.2: U202.2@15.1,92.435 15.1,91.838 15.825,91.113 15.9,91.113 16.15,90.863 R209.2@16.15,90.788 16.15,87.663 C207.1@16,87.513
1V8_PG: R208.1 R213.2 U202.8 | length 33.4
  S1 (SIG) w0.2: U202.8@14.6,93.725 14.6,93.95 14.575,93.975 14.417,93.975 14.3,94.092 R208.1@14.3,95.75 14.3,97.525 v2(14.85,98.075)
  S1 (SIG) w0.3: R213.2@13.125,77.459 13.125,76.675 v2(13.8,76)
  S3 (SIG) w0.3: v2(13.8,76) 14.81,77.01 14.81,83.783 14.35,84.243 14.35,84.675 9.5,89.525 9.5,92.725 v2(14.85,98.075)
1V8_SW: L201.1 U202.6
1V35_EN: R213.1 U204.1 | length 2.2
  S1 (SIG) w0.2: R213.1@14.325,77.459 14.575,77.709 14.575,78.528 14.6,78.553 U204.1@14.6,79.546
1V35_FB: C215.1 R212.1 R215.2 U204.2 | length 5.2
  S1 (SIG) w0.2: U204.2@15.1,79.546 15.1,79.321 15.275,79.146 15.275,79.075 16.275,78.075 R215.2@16.275,78 16.125,77.85 C215.1@16.125,74.9
1V35_PG: R214.1 R217.2 U204.8 | length 59.5
  S1 (SIG) w0.2: v2(13.235,84.225) 13.279,84.181 13.569,84.181 14.3,83.45 R214.1@14.3,82.786 14.3,81.911 14.6,81.611 U204.8@14.6,80.836
  S1 (SIG) w0.3: v2(13.125,32.725) R217.2@13.125,33.9
  S3 (SIG) w0.3: v2(13.125,32.725) 13.125,36.55 9.925,39.75 9.925,80.915 v2(13.235,84.225)
1V35_SW: L202.1 U204.6
3V3_EN: R217.1 U205.1 | length 1.9
  S1 (SIG) w0.2: R217.1@14.248,33.885 14.498,34.135 14.498,34.771 14.6,34.874 U205.1@14.6,35.685
3V3_FB: C219.1 R216.1 R218.2 U205.2 | length 5.2
  S1 (SIG) w0.2: U205.2@15.1,35.685 15.1,34.975 16.1,33.975 R218.2@16.1,33.9 ccw(c16.319,33.681) 16.009,33.681 C219.1@16.009,30.942
3V3_PG: C802.2 R211.2 R801.1 U205.8 U800.2 | length 36.6
  S1 (SIG) w0.2: U205.8@14.6,36.975 14.625,36.95 14.625,36.725 14.775,36.575 14.775,36.542 14.987,36.33 16.395,36.33 18.775,33.95 18.775,30.25 19.5,29.525 25.275,29.525 27.675,27.125 R211.2@27.675,25.05
  S10 (SIG) w0.2: U800.2@20.525,24.6 20.625,24.5 20.625,24.05 21.15,23.525 25.7,23.525 26.55,24.375 26.55,28.175 v2(26.275,28.45) 25.1,28.45 C802.2@24.825,28.175 24.45,28.55 R801.1@22.8,28.55
3V3_PG_R: Q200.1 R211.1 | length 4.5
  S1 (SIG) w0.2: R211.1@27.675,23.75 27.675,22.85 30.05,20.475 Q200.1@30.05,20.275
3V3_SW: L203.1 U205.6
+1V0: C200.2 C201.2 C202.2 C303.1 C304.2 C305.2 C306.2 C307.2 C308.2 C309.2 C319.2 C320.2 C321.2 C322.2 C323.1 C347.2 C348.2 C349.1 L200.2 R201.2 U300.G7 U300.G11 U300.G13 U300.H10 U300.H12 U300.J7 U300.J13 U300.K12 U300.L7 U300.L13 U300.M12 U300.N7 U300.N13 U300.P8 U300.P12 U300.R7 U300.R13 | length 49
  S1 (SIG) w0.2: R201.2@17.4,46.65 17.4,45.075 C200.2@17.5,44.975 18.3,44.975 v2(18.975,45.65)
  S1 (SIG) w0.3: v1(57.888,53.595) U300.R7@58.288,53.995 U300.P8@59.088,54.795 ; v1(57.888,55.195) U300.N7@58.288,55.595 ; v1(57.888,56.795) U300.L7@58.288,57.195 ; v1(57.888,59.195) U300.J7@58.288,58.795 ; v1(57.888,60.795) U300.G7@58.288,60.395 ; v1(60.288,59.995) U300.H10@60.688,59.595 ; U300.G11@61.488,60.395 v1(61.888,60.795) ; U300.P12@62.288,54.795 v1(62.688,54.395) U300.R13@63.088,53.995 v1(63.488,53.595) ; U300.M12@62.288,56.395 v1(62.688,55.995) ; U300.H12@62.288,59.595 v1(62.688,59.995) U300.G13@63.088,60.395 ; v1(62.688,58.395) U300.K12@62.288,57.995 U300.L13@63.088,57.195 v1(63.488,56.795) ; U300.N13@63.088,55.595 v1(63.488,55.195) ; U300.J13@63.088,58.795 v1(63.488,59.195)
  S10 (SIG) w0.2: v2(18.975,45.65) 18.975,45.667 19.225,45.917 19.225,52.6 v2(19.55,52.925)
  S10 (SIG) w0.3: C322.2@17.15,51.1 17.15,52.8 C323.1@17.55,53.2 18.075,53.725 v2(19.55,53.725) ; C348.2@24.425,41.475 24.475,41.525 v3(24.475,42.35) ; C349.1@27.125,42.575 27.125,43.719 27.35,43.944 v3(27.35,44.025) ; v1(57.888,53.595) 57.907,53.614 58.414,53.614 C320.2@58.5,53.7 ; C308.2@57.9,57.5 57.894,57.494 57.894,56.801 v1(57.888,56.795) v1(57.888,55.195) 57.907,55.214 58.514,55.214 C309.2@58.6,55.3 ; v1(60.288,59.995) 60.315,59.995 60.381,60.061 60.404,60.061 60.64,60.297 60.767,60.297 60.783,60.312 60.993,60.312 C319.2@61.093,60.412 ; C306.2@60.932,61.35 61.332,61.35 v1(61.888,60.795) ; v1(62.688,54.395) v1(63.488,55.195) ; v1(62.688,58.395) v1(63.488,59.195) v1(62.688,59.995) ; C321.2@62.8,53.7 62.886,53.614 63.468,53.614 v1(63.488,53.595) ; C347.2@63.55,57.6 63.55,56.884 63.488,56.822 v1(63.488,56.795) v1(62.688,55.995) v1(63.488,55.195) ; C307.2@64.2,55.15 64.174,55.176 63.507,55.176 v1(63.488,55.195)
  S10 (SIG) w1: C304.2@22.775,45.75 v3(23.85,45.75) C305.2@25.575,45.75 ; C303.1@48.975,40.65 48.975,40.675 50.35,42.05 v3(50.95,42.05)
  other v2: 20.55,52.925 20.55,53.725
  other v3: 24.713,45.75
+1V0_ETH: C1107.2 C1108.2 C1109.2 C1114.2 C1115.2 C1116.2 L1100.2 U1100.3 U1100.8 U1100.21 U1100.38 | length 42
  S1 (SIG) w0.2: 102.475,80.325 102.6,80.45 U1100.21@102.6,80.7 ; v5(103.375,87.7) 103.4,87.675 U1100.8@103.4,85.56 ; U1100.3@105.4,85.56 105.4,86.769 105.637,87.005 105.637,87.786 v5(105.65,87.8) ; U1100.38@106.835,84.115 108.44,84.115 v5(108.95,84.625)
  S1 (SIG) w0.3: v5(101.075,79.775) 101.2,79.775 101.616,80.191 102.341,80.191 102.475,80.325
  S8 (SIG) w0.3: v5(101.075,79.775) 101.075,78.5 102.95,76.625 108.725,76.625 109.75,77.65 109.75,78.375 v3(109.775,78.4) ; v5(103.375,87.7) 103.429,87.7 103.529,87.8 v5(105.65,87.8) 107.95,87.8 111.125,84.625 ; v5(108.95,84.625) 111.125,84.625 ; v3(110.825,80.4) 112.2,81.775 112.208,81.775 112.208,83.542 111.125,84.625
  S10 (SIG) w0.3: v5(101.075,79.775) 101.129,79.775 101.231,79.673 101.89,79.673 102.215,79.348 C1116.2@102.215,79.323 ; C1109.2@103.375,86.825 v5(103.375,87.7) ; C1107.2@104.9,86.85 104.9,86.875 105.612,87.587 105.612,87.762 v5(105.65,87.8) ; C1108.2@108.35,83.65 108.95,84.25 v5(108.95,84.625)
  other v3: 110.825,78.4 110.825,79.4 109.775,80.4
+1V8: C207.2 C208.2 C209.2 C313.2 C314.2 C315.1 C316.2 C317.2 C318.2 C331.1 C332.2 C333.2 C804.2 C805.2 C1002.2 C1003.2 C1004.2 C1110.2 C1111.2 C1301.2 FB300.2 FB1101.1 FB1501.1 FB1502.1 FB1503.1 J1700.69 J1700.71 J1700.73 J1700.75 J1700.77 L201.2 Q800.1 Q1200.1 Q1201.1 Q1300.1 Q1301.1 R206.2 R800.2 R803.2 R818.2 R1001.2 R1201.1 R1204.1 R1302.1 R1306.1 S801.3 S801.4 S802.3 S802.4 U300.A13 U300.B16 U300.D12 U300.E15 U300.F8 U300.F11 U300.G9 U300.H8 U300.J9 U300.J11 U300.K8 U300.L11 U300.M8 U300.N9 U300.N11 U300.P10 U300.R9 U802.5 U803.5 U1000.11 U1000.28 U1000.30 U1000.32 U1301.B2 U1301.C2 | length 205.1
  S1 (SIG) w0.1: v1(54.725,98.1) 55.225,98.1 R1204.1@55.3,98.175
  S1 (SIG) w0.11: U1301.B2@83.95,23.2 U1301.C2@84.45,23.2 85.15,23.9 C1301.2@86.275,23.9
  S1 (SIG) w0.2: R206.2@17.4,89.226 17.5,89.126 C207.2@17.5,87.513 18.188,87.513 v2(18.95,88.275) ; R800.2@41.1,90.154 41.102,90.152 41.673,90.152 v1(41.675,90.15) ; v3(54.825,83.5) 54.933,83.5 55.283,83.15 R818.2@58.35,83.15 58.075,83.15 57.825,83.4 Q800.1@57.825,84.475 ; R1201.1@55.3,103.05 55.758,103.508 56.433,103.508 Q1200.1@56.45,103.525 56.425,103.55 v1(56.425,104.075) ; v1(59.488,55.195) U300.N9@59.888,55.595 ; S801.3@84.158,68.925 84.675,69.442 v1(84.675,70.025) ; C804.2@85.15,84.251 85.175,84.251 86.324,85.4 88.85,85.4 89.241,85.009 89.241,84.409 C805.2@89.3,84.351 ; U803.5@85.5,82.426 85.4,82.326 84.975,82.326 84.425,81.776 84.425,80.225 84.863,79.787 85.313,79.787 v3(86.3,78.8) 86.408,78.8 86.547,78.939 87.908,78.939 88.461,78.386 88.461,77.882 89.268,77.075 90.937,77.075 92.081,78.219 C1111.2@94.125,78.219 C1110.2@95.617,78.219 97.058,78.219 FB1101.1@97.108,78.169 ; R1306.1@91.181,23.047 92.025,23.047 92.2,23.222 v2@92.281,23.222 ; R1302.1@95.725,22.95 96.569,22.95 96.744,23.125 v2(96.825,23.125)
  S1 (SIG) w0.3: v1(58.688,55.995) U300.M8@59.088,56.395 ; v1@58.688,58.395 U300.K8@59.088,57.995 ; v1(58.688,59.995) U300.H8@59.088,59.595 ; U300.F8@59.088,61.195 v1(59.488,60.795) U300.G9@59.888,60.395 ; v1(59.488,59.195) U300.J9@59.888,58.795 ; U300.R9@59.888,53.995 v1(60.288,54.395) U300.P10@60.688,54.795 ; U300.N11@61.488,55.595 v1(61.888,55.195) ; U300.L11@61.488,57.195 v1(61.888,56.795) ; U300.J11@61.488,58.795 v1(61.888,59.195) ; U300.F11@61.488,61.195 v1(61.888,61.595) ; U300.D12@62.288,62.795 v1(62.688,63.195) ; U300.A13@63.088,65.195 v1@63.088,65.752 ; U300.E15@64.688,61.995 v1(65.088,62.395) ; v1(65.088,64.795) U300.B16@65.488,64.395 ; v1(77.95,98.05) U1000.32@79.725,98.05 ; v1(77.95,100.05) U1000.28@79.725,100.05 ; v1(78.45,99) 78.477,99 78.527,99.05 U1000.30@79.53,99.05 ; U1000.11@84.475,99.05 v1(86.25,99.05) ; C804.2@85.175,84.251 85.5,83.926 U803.5@85.5,82.426 ; C805.2@89.3,84.351 89.569,84.082 90.043,84.082 90.474,83.651 90.65,83.475 90.65,82.836 89.715,81.901 U802.5@89.34,81.901
  S1 (SIG) w1: FB1501.1@45.625,29.5 45.625,29.1 v1(46.025,28.7) ; v1(47.475,28.7) 47.5,28.725 FB1503.1@47.5,29.55 ; v1(49.2,28.65) 49.225,28.675 FB1502.1@49.225,29.5 ; R1204.1@55.3,98.2 55.3,98.45 55.6,98.75 Q1201.1@56.45,98.75 ; C1301.2@86.275,23.9 v2(86.275,25.1) ; Q1301.1@91.731,21.747 91.731,22.199 92.281,22.749 v2@92.281,23.222 ; S801.4@93.258,68.925 93.3,68.967 v1(93.3,70.225) ; Q1300.1@96.275,21.65 96.275,22.101 96.825,22.651 v2(96.825,23.125) ; v1(98.7,70.05) 98.7,69.125 98.9,68.925 S802.3@98.947,68.925 ; S802.4@108.047,68.925 108.15,69.028 v1(108.15,70.225)
  S10 (SIG) w0.11: J1700.77@5,39.8 v2(6.725,39.8) ; J1700.75@5,40.6 v2(6.725,40.6) ; J1700.73@5,41.4 v2(6.725,41.4) ; J1700.71@5,42.2 v2(6.725,42.2) ; J1700.69@5,43 v2(6.725,43)
  S10 (SIG) w0.2: v2(18.95,88.275) 18.975,88.3 18.975,88.825 19.475,89.325 19.475,92.272 21.25,94.047 v2(21.25,97.075) ; R803.2@48.15,74.998 48.15,76.55 v1(48.775,77.175)
  S10 (SIG) w0.3: v2(6.725,39.8) J1700.77@5,39.8 3.675,39.8 3.35,40.125 3.35,40.603 ; v2(6.725,40.6) J1700.75@5,40.6 3.353,40.6 3.35,40.603 ; v2(6.725,41.4) J1700.73@5,41.4 3.551,41.4 3.35,41.601 ; v2(6.725,42.2) J1700.71@5,42.2 3.366,42.2 3.35,42.216 ; v2(6.725,43) J1700.69@5,43 4.9,42.9 3.65,42.9 ; C332.2@17.349,100.75 17.349,99.826 v3(17.9,99.275) ; C331.1@20.349,100.2 20.375,100.174 v3(20.375,99) ; v2(21.25,97.875) 19.05,97.875 3.65,82.475 3.65,42.9 ; v3(57.616,76.85) 57.674,76.907 57.674,77.082 58.15,77.558 FB300.2@58.175,77.558 ; v1(58.688,55.995) 58.715,55.995 58.784,55.925 58.895,55.925 59.1,55.72 59.1,55.582 v1(60.288,54.395) 60.943,55.05 61.716,55.05 61.861,55.195 v1(61.888,55.195) ; C333.2@58.7,57.6 58.69,57.61 58.69,58.393 v1(58.68,58.404) 58.688,58.404 59.479,59.195 v1(59.488,59.195) v1(58.688,59.995) v1(59.488,60.795) ; C317.2@61.1,57 61.305,56.795 v1(61.888,56.795) ; C313.2@62.4,65.5 62.4,65.55 62.5,65.65 62.55,65.65 62.638,65.738 63.074,65.738 v1(63.093,65.757) ; R1001.2@77,99.175 77,98.375 77.325,98.05 77.977,98.05 78.177,97.85 78.575,97.85 C1004.2@78.9,97.525 ; v1(77.95,100.05) 78.675,100.05 C1002.2@78.875,99.85 78.55,99.525 78.525,99.525 78.525,99.102 78.45,99.027 v1(78.45,99) ; C1003.2@85.4,99.7 85.425,99.7 86.056,99.069 86.231,99.069 v1(86.25,99.05) ; 3.35,40.603 3.35,41.601 ; 3.35,41.601 3.35,42.216 ; 3.35,42.216 3.35,42.6 3.65,42.9
  S10 (SIG) w1: v3(44.55,85.225) 44.55,86.417 C315.1@44.633,86.5 ; C314.2@47.725,86.55 47.725,85.75 v3(47.775,85.7) ; C316.2@54.475,85.675 54.475,83.85 v3(54.825,83.5)
  other v2: 92.275,23.25 22.25,97.075 22.25,97.875
+1V8_ETH: C1112.2 C1113.2 FB1101.2 R1100.2 R1101.2 R1102.2 R1103.2 R1113.2 R1114.2 U1100.28 | length 46.5
  S1 (SIG) w0.2: FB1101.2@97.108,79.769 98.55,79.769 C1112.2@98.6,79.719 98.975,80.094 98.975,80.225 99,80.25 v1(99,80.75) ; R1103.2@98.993,73.237 98.996,73.233 98.996,72.529 v2(99,72.525) ; v2(101.125,72.65) 101.125,72.731 101.2,72.806 101.2,73.075 R1102.2@101.375,73.25 ; R1101.2@102.725,73.25 102.725,72.756 102.875,72.606 v2(102.875,72.525) ; R1100.2@104.575,73.25 104.575,72.731 104.8,72.506 v2(104.8,72.475) ; U1100.28@105.39,80.69 105.39,79.475 v5(105.475,79.475)
  S1 (SIG) w0.3: v1(98.575,86.675) 98.602,86.675 98.702,86.775 R1113.2@99.35,86.775 ; v1(107.502,80.1) 108.254,80.1 108.525,80.371 108.525,80.425 R1114.2@108.85,80.75
  S10 (SIG) w0.3: v1(98.575,86.675) 99.175,86.675 99.475,86.375 99.475,85.625 99,85.15 v2(99,72.525) 99.5,72.025 100.529,72.025 101.125,72.621 v2(101.125,72.65) 101.179,72.65 101.304,72.525 v2(102.875,72.525) 102.9,72.5 104.775,72.5 v2(104.8,72.475) 104.8,75.637 105.475,76.313 v5(105.475,79.475) ; C1113.2@104.525,79.15 104.85,79.475 v5(105.475,79.475) ; v1(107.502,80.1) 107.521,80.119 107.591,80.119 107.596,80.125 108.804,80.125 108.95,79.979 108.95,78.821 108.279,78.15 106.568,78.15 105.8,78.918 105.8,79.096 105.475,79.421 v5(105.475,79.475)
+1V8_HDMI_AVDD: C1503.2 C1504.2 C1505.2 C1506.2 C1507.2 FB1501.2 U1500.24 U1500.25 U1500.29 U1500.34 U1500.41 | length 46.3
  S1 (SIG) w0.3: C1507.2@43.726,29.6 43.726,27.324 44.025,27.025 v1(54.05,27.025) ; C1507.2@43.726,29.625 44.051,29.95 44.5,29.95 45.625,31.075 FB1501.2@45.625,31.1 ; v1(56.3,26.525) U1500.25@55.175,26.525 v1(54.05,26.525) v1(54.05,27.025) ; v1(56.3,27.025) U1500.24@55.175,27.025 v1(54.05,27.025) ; C1506.2@57.787,20.012 57.837,20.012 58.35,20.525 58.35,20.575 58.75,20.975 58.75,22.486 58.4,22.836 v1(58.4,23.675) U1500.29@58.4,24.8 v1(58.4,25.925) ; U1500.34@60.9,24.8 v1(60.9,25.925) 61.425,26.45 63.875,26.45 v1(64.4,25.925) U1500.41@64.4,24.8
  S10 (SIG) w0.3: C1504.2@52.875,25.8 52.875,25.825 53.556,26.506 54.031,26.506 v1(54.05,26.525) ; v1(56.3,26.525) 56.3,25.6 56.65,25.25 58.05,25.25 58.381,25.581 58.381,25.906 v1(58.4,25.925) ; v1(56.3,27.025) 56.319,27.044 56.456,27.044 56.761,27.35 C1503.2@57.575,27.35 ; C1503.2@57.55,27.475 57.55,28.225 57.9,28.575 60.7,28.575 60.799,28.476 61,28.275 C1505.2@61,27.525 60.9,27.425 v1(60.9,25.925)
+1V8_HDMI_DVDD: C1512.2 C1513.2 C1514.2 C1515.2 C1516.2 C1517.2 FB1503.2 R1501.2 R1502.2 U1500.1 U1500.19 U1500.49 U1500.76 U1500.77 | length 87.8
  S1 (SIG) w0.3: FB1503.2@47.5,31.15 47.5,31.95 49.125,33.575 C1512.2@50.675,33.575 50.675,33.6 51.431,34.356 52.031,34.356 v1(52.05,34.375) 52.05,37.5 51.974,37.576 52.923,38.525 v1(54.048,38.525) ; v1(54.05,29.525) U1500.19@55.175,29.525 v1(56.3,29.525) ; v1(54.3,15.95) 54.319,15.931 54.644,15.931 R1501.2@55.625,14.95 ; U1500.1@55.175,38.525 v1(54.048,38.525) ; U1500.49@68.4,24.8 v1(68.4,25.925) ; U1500.77@68.4,40.25 U1500.76@68.9,40.25 68.9,40.825 69.325,40.825 69.55,41.05 C1517.2@69.55,41.975 69.525,41.975 68.55,42.95 62.432,42.95 62.032,42.55 52.75,42.55 52.225,42.025 52.225,40.05 52.901,39.374 53.601,39.374 53.975,39 53.975,38.625 54.048,38.552 v1(54.048,38.525) ; v1(70.05,25.475) 70.077,25.475 70.127,25.425 R1502.2@70.725,25.425
  S10 (SIG) w0.3: v1(52.05,34.375) 52.05,31.525 v1(54.05,29.525) 51.1,26.575 51.1,19.15 v1(54.3,15.95) ; v1(54.048,38.525) 56.925,38.525 57.225,38.225 57.25,38.225 57.575,37.9 C1515.2@57.575,37.875 ; v1(56.3,29.525) 56.95,29.525 C1514.2@57.475,30.05 ; C1514.2@57.475,30.075 C1514.2@57.475,30.05 ; v1(70.05,25.475) 68.869,25.475 68.419,25.925 v1(68.4,25.925) 68.4,27.975 68.375,28 68.375,28.025 68.075,28.325 68.075,29.224 67.899,29.4 58.15,29.4 57.825,29.725 57.8,29.725 C1514.2@57.475,30.05
+1V8_HDMI_PLVDD: C1508.2 C1509.2 C1510.2 FB1502.2 U1500.21 U1500.26 | length 14.7
  S1 (SIG) w0.3: FB1502.2@49.225,31.1 49.225,31.075 50.5,29.8 50.775,29.8 51.1,29.475 C1508.2@51.1,29.45 C1509.2@52.95,29.45 52.95,29.425 53.831,28.544 54.031,28.544 v1(54.05,28.525) U1500.21@55.175,28.525 v1(56.3,28.525) 56.319,28.506 56.794,28.506 57,28.3 57,26.052 56.9,25.952 56.9,24.725 55.8,23.625 55.8,23.6 55.475,23.275 C1510.2@55.45,23.275
  other v1: 56.9,25.925
+1V8_PLL: C300.2 C301.2 FB300.1 U300.G8 | length 22.9
  S1 (SIG) w0.3: v1(58.688,60.795) U300.G8@59.088,60.395
  S5 (PWR) w0.2: v1(58.688,60.795) 58.688,61.829 59.088,62.229 59.088,63.36 59.322,63.595 59.653,63.595 59.888,63.829 59.888,64.16 60.122,64.395 61.253,64.395 61.488,64.629 61.488,64.96 61.253,65.195 61.236,65.195 60.5,65.931 60.5,68.909 60.75,69.159 60.75,69.491 60.2,70.041 v3(60.2,74.825)
  S10 (SIG) w0.3: v1(58.688,60.795) 58.745,60.795 59,61.05 59.004,61.05 59.15,61.196 59.15,61.2 C300.2@59.55,61.6 ; C301.2@59.85,78.9 59.775,78.825 FB300.1@59.775,77.558 59.8,77.558 60.125,77.233 60.125,77.208 60.2,77.133 v3(60.2,74.825)
+1V35: C214.2 C215.2 C216.2 C217.2 C341.2 C342.2 C343.2 C344.2 C345.2 C346.1 C701.2 C702.2 C703.2 C704.2 C705.2 C707.2 C708.2 C709.2 C710.2 C711.2 C714.2 C715.2 C716.2 C717.2 C718.2 C719.2 C720.2 C721.2 C722.2 C723.2 C725.2 C726.2 C727.2 C728.2 C729.2 C731.2 C732.2 C733.2 C734.2 C735.2 C736.2 C737.2 C738.2 C739.2 C740.2 C741.2 C742.2 C743.2 C744.2 C745.2 L202.2 R212.2 R625.2 U203.1 U203.2 U300.A3 U300.D2 U300.E5 U300.G1 U300.H4 U300.L3 U300.P2 U300.R5 U300.U1 U300.V4 U700.A1 U700.A8 U700.B2 U700.C1 U700.C9 U700.D2 U700.D9 U700.E9 U700.F1 U700.G7 U700.H2 U700.H9 U700.K2 U700.K8 U700.N1 U700.N9 U700.R1 U700.R9 U701.A1 U701.A8 U701.B2 U701.C1 U701.C9 U701.D2 U701.D9 U701.E9 U701.F1 U701.G7 U701.H2 U701.H9 U701.K2 U701.K8 U701.N1 U701.N9 U701.R1 U701.R9 | length 108.5
  S1 (SIG) w0.1: U701.E9@39.7,46.95 U701.D9@40.5,46.95
  S1 (SIG) w0.2: v2(8.05,83.525) 8.075,83.525 8.5,83.95 v2(8.525,83.95) ; R212.2@17.525,76.525 17.525,75 C215.2@17.625,74.9 17.708,74.983 18.308,74.983 v2(19.05,75.725)
  S1 (SIG) w0.3: C719.2@7.725,75.65 7.6,75.775 C720.2@7.6,81.45 7.6,83.021 8.05,83.471 v2(8.05,83.525) ; v1(31.3,46.55) U701.R9@31.7,46.95 ; v1(31.3,53.75) U701.R1@31.7,53.35 ; v1(31.3,62) U700.R9@31.7,62.4 ; v1@31.3,69.2 U700.R1@31.7,68.8 ; v1(32.9,46.55) U701.N9@33.3,46.95 ; v1(32.9,62) U700.N9@33.3,62.4 ; v1(32.9,69.2) U700.N1@33.3,68.8 ; U701.N1@33.3,53.35 v1(33.7,53.75) ; v1(35.3,48.15) U701.K8@35.7,47.75 ; v1(35.3,63.6) U700.K8@35.7,63.2 ; U701.K2@35.7,52.55 v1(36.1,52.15) ; U700.K2@35.7,68 v1(36.1,67.6) ; v1(36.9,46.55) U701.H9@37.3,46.95 ; v1(36.9,62.8) U700.H9@37.3,62.4 ; U701.H2@37.3,52.55 v1(37.7,52.95) ; U700.H2@37.3,68 v1(37.7,68.4) ; U701.G7@38.1,48.55 v1(38.5,48.15) ; U700.G7@38.1,64 v1(38.5,63.6) ; v1(38.5,53.75) U701.F1@38.9,53.35 ; v1(38.5,69.2) U700.F1@38.9,68.8 ; v1(39.3,46.55) U701.E9@39.7,46.95 ; v1(39.3,62) U700.E9@39.7,62.4 ; v1(40.1,52.95) U701.D2@40.5,52.55 ; v1(40.1,62.8) U700.D9@40.5,62.4 ; U700.D2@40.5,68 v1(40.9,67.6) ; v1(40.9,53.75) U701.C1@41.3,53.35 ; v1(40.9,69.2) U700.C1@41.3,68.8 ; v1(41.3,46.375) U701.C9@41.3,46.95 U701.C9@41.313,46.937 ; U700.C9@41.3,62.4 41.313,62.387 41.313,61.937 v1(41.325,61.925) ; v1(41.7,52.15) U701.B2@42.1,52.55 ; v1(41.7,67.6) U700.B2@42.1,68 ; U701.A8@42.9,47.75 42.913,47.737 43.413,47.737 v1(43.425,47.725) ; U701.A1@42.9,53.35 v1(43.3,53.75) ; U700.A8@42.9,63.2 42.913,63.187 43.413,63.187 v1(43.425,63.175) ; U700.A1@42.9,68.8 v1(43.3,69.2) ; v1(52.913,52.395) U300.U1@53.488,52.395 ; v1@52.93,60.395 U300.G1@53.488,60.395 ; v1(53.888,54.395) U300.P2@54.288,54.795 ; v1(53.888,63.195) U300.D2@54.288,62.795 ; v1(54.688,56.795) U300.L3@55.088,57.195 ; U300.A3@55.088,65.195 55.088,65.752 v1(55.093,65.757) ; v1(55.488,51.195) U300.V4@55.888,51.595 ; v1(55.488,59.995) U300.H4@55.888,59.595 ; v1(56.288,53.595) U300.R5@56.688,53.995 ; v1(56.288,62.395) U300.E5@56.688,61.995
  S3 (SIG) w0.2: v2(19.05,75.725) 20.85,75.725 22.217,77.092 22.217,79.56 19.35,82.427 v2(19.35,84.976)